# Altium PCB SD171-6.0PCB4.PcbDoc (part 8 of 11)
Units mil, origin at the board's own origin, x right, y up, seen from the top; angles counter-clockwise.
Board outline 5995 x 3921.26 mil, 6 copper layers (Top Layer, GND, Mid-Layer 1, Mid-Layer 2, VCC, Bottom Layer); 477 components, 539 nets, 2143 pads, 1050 vias.
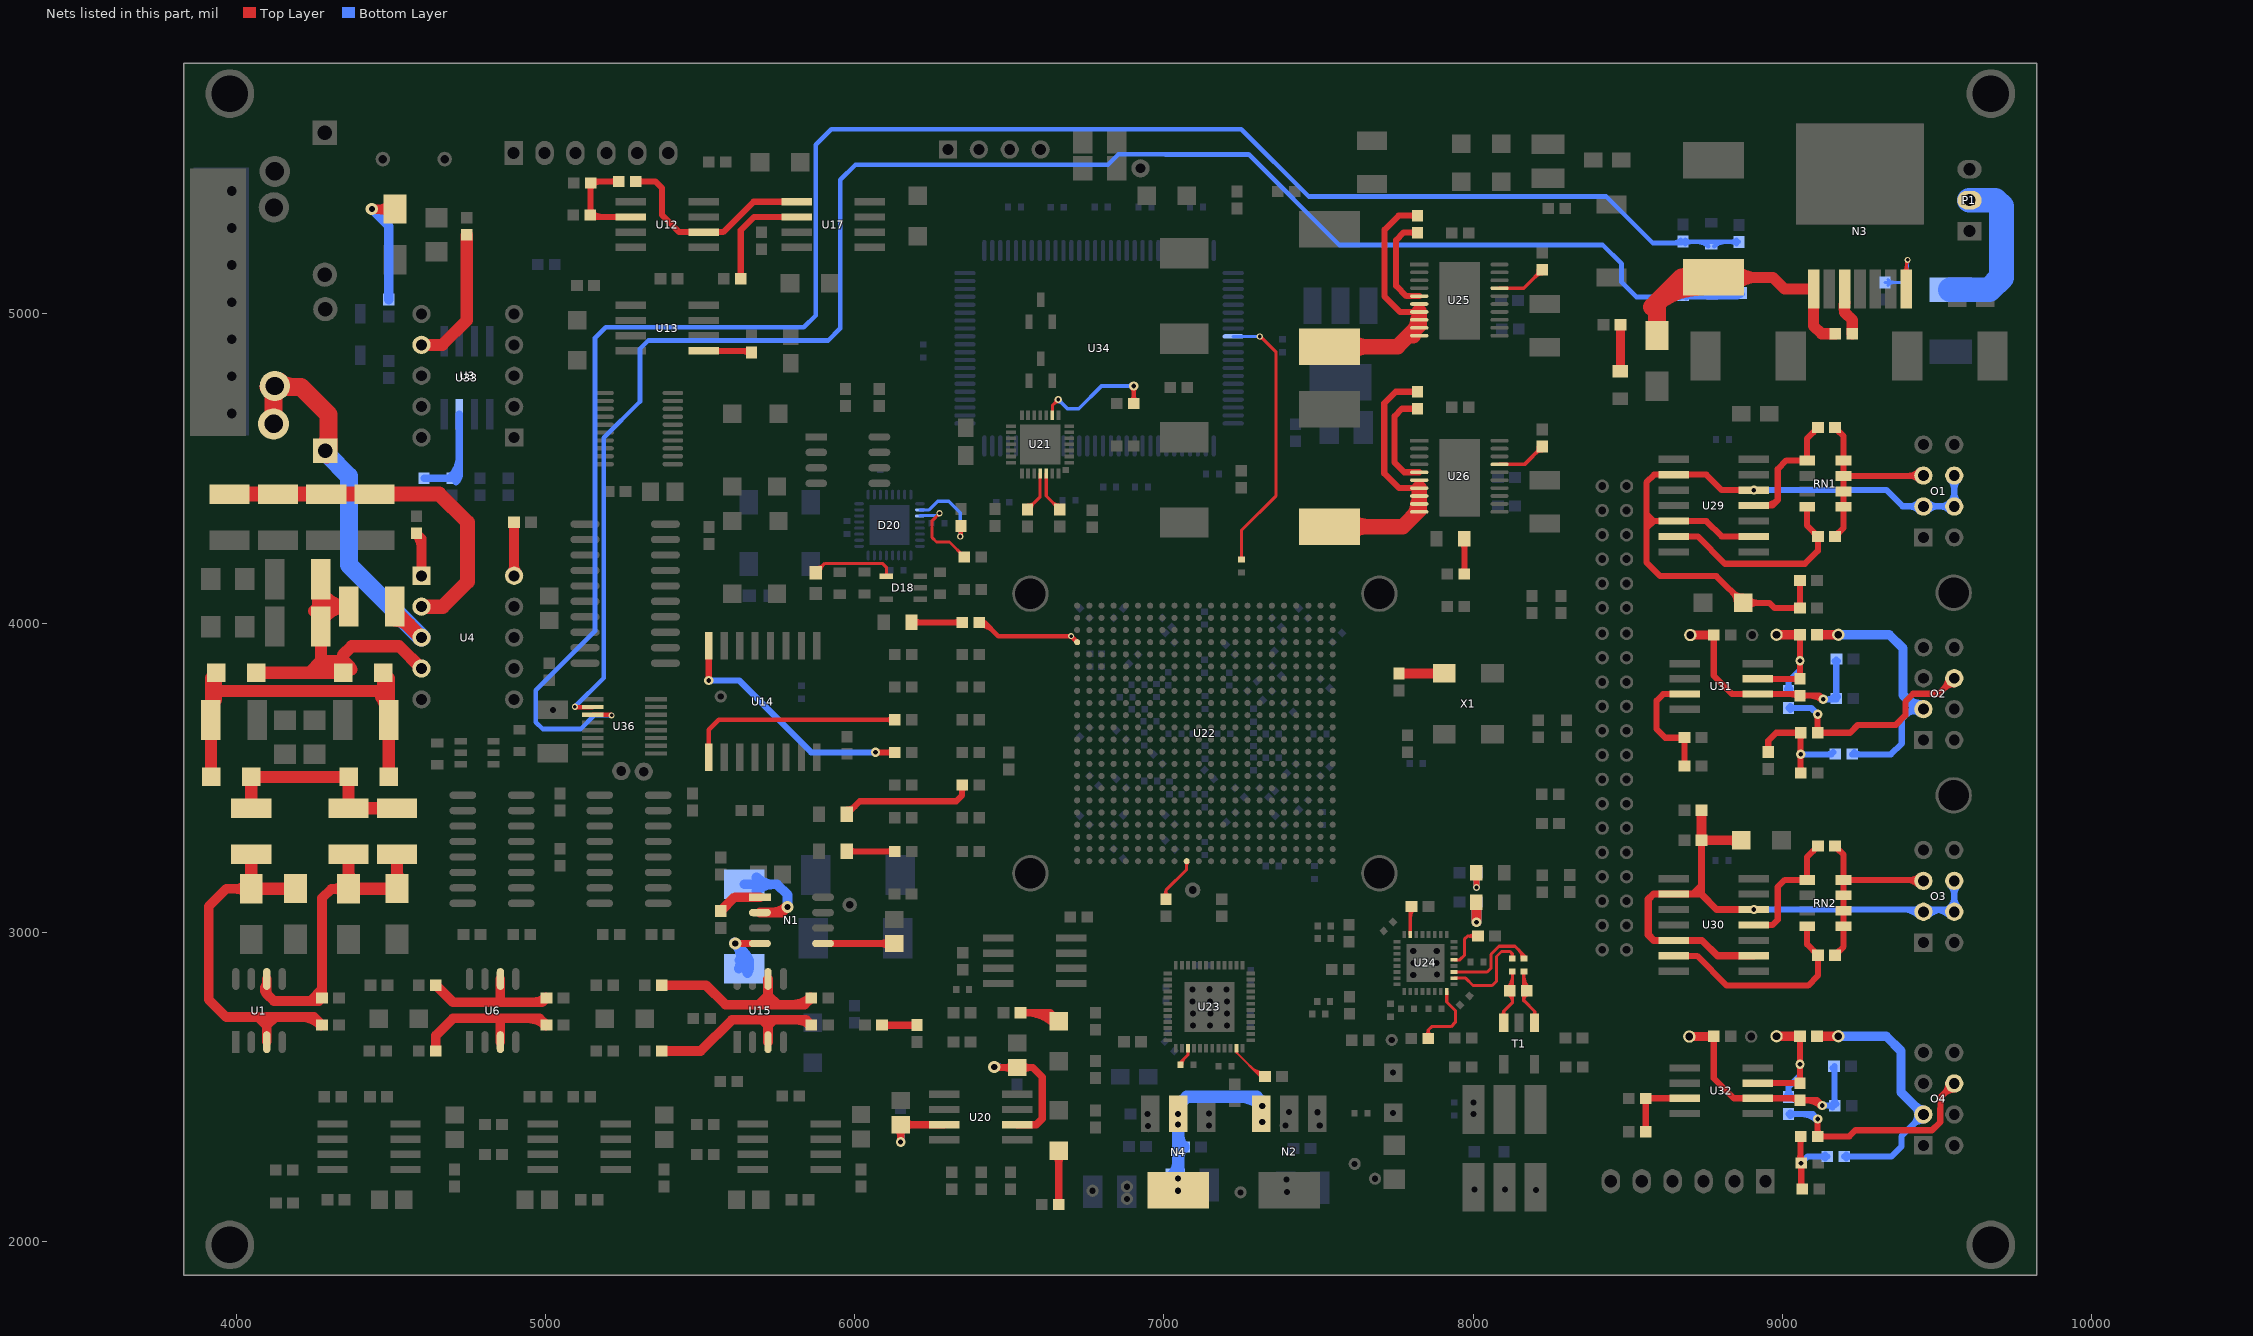
[diagram p12: the nets of this part, all layers, seen from the top]

## Via types
v1: diameter 19.68, hole 11.81, Top Layer to Bottom Layer, 521 vias
v2: diameter 50, hole 25, Top Layer to Bottom Layer, 162 vias
v3: diameter 30, hole 15, Top Layer to Bottom Layer, 100 vias
v4: diameter 39.37, hole 19.68, Top Layer to Bottom Layer, 74 vias
v5: diameter 31.5, hole 15.75, Top Layer to Bottom Layer, 44 vias
v6: diameter 40, hole 20, Top Layer to Bottom Layer, 38 vias
v7: diameter 24, hole 12, Top Layer to Bottom Layer, 33 vias
v8: diameter 47.24, hole 23.62, Top Layer to Bottom Layer, 24 vias
v9: diameter 59.06, hole 31.5, Top Layer to Bottom Layer, 10 vias
v10: diameter 60, hole 30, Top Layer to Bottom Layer, 9 vias
v11: diameter 25.98, hole 12.99, Top Layer to Bottom Layer, tented top, 9 vias
v12: diameter 23.62, hole 11.81, Top Layer to Bottom Layer, 8 vias
v13: diameter 20, hole 12, Top Layer to Bottom Layer, 6 vias
v14: diameter 50, hole 27.56, Top Layer to Bottom Layer, 4 vias
v15: diameter 51.18, hole 27.56, Top Layer to Bottom Layer, 2 vias
v16: diameter 39.37, hole 23.62, Top Layer to Bottom Layer, 2 vias
v17: diameter 80, hole 40, Top Layer to Bottom Layer, 1 vias
v18: diameter 47.24, hole 19.68, Top Layer to Bottom Layer, 1 vias
v19: diameter 47.24, hole 27.56, Top Layer to Bottom Layer, 1 vias
v20: diameter 22.05, hole 11.81, Top Layer to Bottom Layer, 1 vias

## Nets (pads, with @x,y where several pads share a name; then routed paths per layer and width w, separated by ;. In a path a pad name is that pad's centre, name@x,y a point inside that pad or via, vN(x,y) a via of type N, cw(c..) or ccw(c..) an arc to the next point about the centre after c; other vN are vias at no path point) (continued)
NetC55_2: C55.2 U23.27 | length 84.4
  Top Layer w10: C55.2@7053.3,2571.02 7053.3,2578.3 7077.51,2602.51 U23.27@7077.51,2624 ; C55.2@7058.3,2572.02 cw(c7085.54,2572.02) 7066.28,2591.28
NetC64_2: C64.2 U34.89 | length 978.3
  Top Layer w10: C64.2@7251.02,4205.7 7251.02,4300.02 7363,4412 7363,4876 v1@7310,4929 ; 7251.02,4217.77 ccw(c7263.09,4217.77) 7254.55,4209.23 cw(c7263.09,4217.77) 7251.02,4217.77 ; 7251.02,4217.77 cw(c7238.95,4217.77) 7247.48,4209.23 ccw(c7238.95,4217.77) 7251.02,4217.77 ; v1@7310,4922.16 cw(c7310,4905.64) 7321.68,4917.32 ccw(c7310,4905.64) v1@7310,4922.16
  Bottom Layer w10: U34.89@7224.06,4927.39 7309.61,4927.39 v1(7310,4927) ; 7297.38,4927.39 cw(c7297.38,4914.38) 7306.58,4923.58 ccw(c7297.38,4914.38) 7297.38,4927.39 ; 7299.24,4927.39 ccw(c7299.24,4937.76) 7306.58,4930.42 cw(c7299.24,4937.76) 7299.24,4927.39
NetC70_1: C70.1 L27.2 U25.6 U25.7 U25.8 U25.9 U25.10 | length 1293.4
  Top Layer w20: C70.1@7820,5318 7759,5318 7714,5273 7714,5056 7763.54,5006.46 U25.7@7826,5006.46 ; 7800.69,5318 ccw(c7800.69,5337.31) 7814.34,5323.66 cw(c7800.69,5337.31) 7800.69,5318 ; 7800.69,5318 cw(c7800.69,5298.69) 7814.34,5312.34 ccw(c7800.69,5298.69) 7800.69,5318
  Top Layer w50: L27.2@7536,4894 7756,4894 7826,4964 U25.8@7826,4980.87 U25.7@7826,5006.46 ; 7657.59,4894 ccw(c7657.59,4811.78) 7599.45,4869.92 cw(c7657.59,4811.78) 7657.59,4894 ; 7657.59,4894 cw(c7657.59,4976.22) 7599.45,4918.08 ccw(c7657.59,4976.22) 7657.59,4894 ; 7806.35,4944.35 ccw(c7769.82,4980.87) 7821.47,4980.87 cw(c7769.82,4980.87) 7806.35,4944.35 ; U25.10@7806.91,4929.68 cw(c7843.65,4929.68) 7817.67,4955.67 ccw(c7843.65,4929.68) U25.10@7806.91,4929.68
NetC70_2: C70.2 U25.5 | length 376.4
  Top Layer w20: C70.2@7820,5263 7775,5263 7751,5239 7751,5091 7784.36,5057.64 U25.5@7826,5057.64 ; 7800.69,5263 ccw(c7800.69,5282.31) 7814.34,5268.66 cw(c7800.69,5282.31) 7800.69,5263 ; 7800.69,5263 cw(c7800.69,5243.69) 7814.34,5257.34 ccw(c7800.69,5243.69) 7800.69,5263
NetC71_1: C71.1 L28.2 U26.6 U26.7 U26.8 U26.9 U26.10 | length 1278.5
  Top Layer w20: C71.1@7820,4748 7750,4748 7713,4711 7713,4484 7760.54,4436.46 U26.7@7826,4436.46 ; 7800.69,4748 ccw(c7800.69,4767.31) 7814.34,4753.66 cw(c7800.69,4767.31) 7800.69,4748 ; 7800.69,4748 cw(c7800.69,4728.69) 7814.34,4742.34 ccw(c7800.69,4728.69) 7800.69,4748
  Top Layer w50: L28.2@7536,4312 7773,4312 7826,4365 U26.9@7826,4385.28 U26.8@7826,4410.87 U26.7@7826,4436.46 ; 7657.59,4312 ccw(c7657.59,4229.78) 7599.45,4287.92 cw(c7657.59,4229.78) 7657.59,4312 ; 7657.59,4312 cw(c7657.59,4394.22) 7599.45,4336.08 ccw(c7657.59,4394.22) 7657.59,4312 ; 7803.93,4342.93 ccw(c7761.59,4385.28) 7821.47,4385.28 cw(c7761.59,4385.28) 7803.93,4342.93
NetC71_2: C71.2 U26.5 | length 387.6
  Top Layer w20: C71.2@7820,4693 7770,4693 7746,4669 7746,4519 7777.36,4487.64 U26.5@7826,4487.64 ; 7800.69,4693 ccw(c7800.69,4712.31) 7814.34,4698.66 cw(c7800.69,4712.31) 7800.69,4693 ; 7800.69,4693 cw(c7800.69,4673.69) 7814.34,4687.34 ccw(c7800.69,4673.69) 7800.69,4693
NetC72_1: C72.1 U24.3 | length 370.8
  Top Layer w10: U24.3@7937.84,2870.64 8045.64,2870.64 8058,2883 8058,2928 8084,2954 8135.98,2954 8164.98,2925 ; 8147.18,2942.81 cw(c8118.67,2914.3) C72.1@8158.98,2914.3 ; C72.1@8161.78,2918.14 ccw(c8156.04,2925) 8164.98,2925 ; 8164.25,2925.74 cw(c8152.81,2914.3) C72.1@8168.98,2914.3 ; C72.1@8164.98,2914.3 8164.98,2925 ; C72.1@8168.19,2918.14 cw(c8173.93,2925) 8164.98,2925
NetC72_2: C72.2 R100.1 T1.3 | length 354.4
  Top Layer w10: C72.2@8160.45,2868.77 cw(c8151.87,2860.19) 8164,2860.19 ; C72.2@8161.98,2872.3 8164,2870.28 8164,2779 8200,2743 ; 8164,2777.72 cw(c8185.68,2777.72) R100.1@8177.75,2797.9 ; R100.1@8164,2792.39 cw(c8179.92,2792.39) R100.1@8174.1,2807.21 ; 8164,2838.97 ccw(c8201.97,2838.97) R100.1@8175.12,2812.12 ; 8164,2860.27 cw(c8176.01,2860.27) C72.2@8167.52,2868.77 ; C72.2@8164,2863.11 ccw(c8226.11,2863.11) R100.1@8182.19,2819.19 ; T1.3@8193.31,2730.22 ccw(c8184.46,2743) 8200,2743 ; T1.3@8199,2707 8200,2708 8200,2743 ; T1.3@8205.9,2729.24 cw(c8219,2743) 8200,2743
NetC73_1: C73.1 U24.2 | length 329.1
  Top Layer w10: U24.2@7937.84,2850.94 7976.06,2850.94 8000,2827 8062,2827 8076,2841 8076,2921 8092,2937 8120,2937 8126.98,2930.02 C73.1@8126.98,2914.3 ; C73.1@8123.45,2917.84 ccw(c8114.91,2926.37) 8126.98,2926.37 ccw(c8139.05,2926.37) C73.1@8130.52,2917.84
NetC73_2: C73.2 R100.2 T1.1 | length 356.2
  Top Layer w10: T1.1@8092.42,2729.53 ccw(c8079.8,2744) 8099,2744 ; T1.1@8099,2707 8099,2744 ; T1.1@8105.57,2729.53 cw(c8118.2,2744) 8099,2744 ; R100.2@8110.81,2819.19 ccw(c8069.3,2860.7) 8128,2860.7 ; R100.2@8113.12,2798.97 cw(c8096.38,2772.15) 8128,2772.15 ; R100.2@8117.88,2812.12 ccw(c8093.44,2836.56) 8128,2836.56 ; R100.2@8118.41,2807.45 cw(c8107.63,2790.17) 8128,2790.17 ; C73.2@8124.45,2868.77 cw(c8115.87,2860.19) 8128,2860.19 ; C73.2@8124.98,2872.3 8128,2869.28 8128,2773 8099,2744 ; 8128,2860.27 cw(c8140.01,2860.27) C73.2@8131.52,2868.77
NetC78_1: C78.1 U25.17 | length 253.9
  Top Layer w12: U25.17@8085.84,5083.23 8164.23,5083.23 C78.1@8224,5143 ; 8201.81,5120.81 cw(c8224,5098.62) 8224,5130 ccw(c8224,5098.62) 8201.81,5120.81 ; 8204.22,5123.22 ccw(c8185.44,5142) 8212,5142 cw(c8185.44,5142) 8204.22,5123.22
NetC80_1: C80.1 U26.17 | length 253.1
  Top Layer w12: U26.17@8085.84,4513.23 8166.23,4513.23 C80.1@8224,4571 ; 8201.81,4548.81 cw(c8224,4526.62) 8224,4558 ccw(c8224,4526.62) 8201.81,4548.81 ; 8204.22,4551.22 ccw(c8185.44,4570) 8212,4570 cw(c8185.44,4570) 8204.22,4551.22
NetC85_1: C85.1 R107.1 U32.7 | length 415.4
  Top Layer w20: C85.1@8559,2354 8559.09,2354.09 8559.09,2462.09 U32.7@8684.38,2462.09 ; C85.1@8553.34,2359.66 ccw(c8539.46,2373.54) 8559.09,2373.54 cw(c8539.46,2373.54) C85.1@8553.34,2359.66 ; R107.1@8553.34,2456.34 cw(c8539.46,2442.46) 8559.09,2442.46 ccw(c8539.46,2442.46) R107.1@8553.34,2456.34 ; 8559.09,2373.08 ccw(c8578.08,2373.08) 8564.66,2359.66 cw(c8578.08,2373.08) 8559.09,2373.08 ; 8559.09,2442.92 cw(c8578.08,2442.92) 8564.66,2456.34 ccw(c8578.08,2442.92) 8559.09,2442.92 ; R107.1@8565.66,2456.34 cw(c8579.54,2442.46) 8579.54,2462.09 ccw(c8579.54,2442.46) R107.1@8565.66,2456.34 ; R107.1@8565.66,2467.66 ccw(c8579.08,2481.08) 8579.08,2462.09 cw(c8579.08,2481.08) R107.1@8565.66,2467.66
NetC86_1: C86.1 pad.1@8703,3961 R111.1 R126.1 R127.2 U31.2 | length 1102.8
  Top Layer w20: C86.1@8779,3961 8779,3830 8838.91,3770.09 U31.2@8920.6,3770.09 9052.91,3770.09 R111.1@9058,3765 9121,3765 v3(9133,3753) ; 8779,3941.69 ccw(c8759.69,3941.69) 8773.34,3955.34 cw(c8759.69,3941.69) 8779,3941.69 ; 8779,3941.69 cw(c8798.31,3941.69) 8784.66,3955.34 ccw(c8798.31,3941.69) 8779,3941.69 ; 9077.31,3765 ccw(c9077.31,3745.69) 9063.66,3759.34 cw(c9077.31,3745.69) 9077.31,3765 ; 9077.31,3765 cw(c9077.31,3784.31) 9063.66,3770.66 ccw(c9077.31,3784.31) 9077.31,3765 ; 9028.8,3770.09 cw(c9028.8,3736.8) 9052.34,3760.34 ccw(c9028.8,3736.8) 9028.8,3770.09 ; 9091.96,3765 cw(c9091.96,3711.96) 9129.46,3749.46 ccw(c9091.96,3711.96) 9091.96,3765
  Top Layer w30: pad.1@8703,3961 C86.1@8779,3961
  Bottom Layer w20: v3(9133,3753) R127.2@9175,3753 ; v3@9147.44,3753 ccw(c9147.44,3782.56) R127.2@9168.34,3761.66 ; R127.2@9169.34,3761.66 ccw(c9155.69,3775.31) 9175,3775.31 ccw(c9194.31,3775.31) R127.2@9180.66,3761.66 ; R126.1@9169.34,3877.34 cw(c9155.69,3863.69) 9175,3863.69 cw(c9194.31,3863.69) R126.1@9180.66,3877.34 ; R127.2@9175,3754 R126.1@9175,3881
NetC87_1: C87.1 C90.2 L34.2 O3.2 O3.6 O3.7 U30.2 U30.5 U30.9 U30.12 | length 2588.8
  Top Layer w20: U30.9@8908.84,2923 U30.9@8939.84,2923 ; v3(8908.84,3073) U30.12@8939.84,3073
  Top Layer w23.62: 8739,3154 8739,3150 ; C87.1@8739,3297 8739,3150 ; U30.9@8908.84,2923 8791,2923 8741,2973 U30.5@8649,2973 8585,2973 8567,2991 8567,3106 8584,3123 U30.2@8649,3123 8712,3123 ; v3(8908.84,3073) 8788,3073 8738,3123 ; 8712,3123 8738,3123 ; 8712,3123 8739,3150 ; 8738,3123 8739,3124 8739,3150
  Top Layer w31.5: C90.2@8739,3394 C87.1@8739,3297 L34.2@8868,3297 ; 8833.59,3297 ccw(c8833.59,3331.41) 8857.92,3307.08 cw(c8833.59,3331.41) 8833.59,3297 ; 8833.59,3297 cw(c8833.59,3262.59) 8857.92,3286.92 ccw(c8833.59,3262.59) 8833.59,3297
  Bottom Layer w20: v3(8908.84,3073) 9549.67,3073 O3.7@9557,3065.67 O3.6@9557,3165.67 ; 9392.15,3073 cw(c9392.15,3000.82) O3.2@9443.19,3051.86 ; 9427.56,3073 ccw(c9427.56,3095.11) O3.2@9443.19,3079.47 ; O3.2@9470.81,3051.86 cw(c9521.85,3000.82) 9521.85,3073 ; O3.2@9470.81,3079.47 ccw(c9486.44,3095.11) 9486.44,3073 ; 9492.15,3073 cw(c9492.15,3000.82) O3.7@9543.19,3051.86 ; 9527.56,3073 ccw(c9527.56,3095.11) 9543.19,3079.47 ccw(c9509.86,3112.81) 9557,3112.81 ccw(c9604.14,3112.81) O3.7@9570.81,3079.47 ; O3.6@9543.19,3151.86 cw(c9509.86,3118.52) 9557,3118.52 cw(c9604.14,3118.52) O3.6@9570.81,3151.86
NetC89_1: C89.1 R108.1 U31.7 | length 566.7
  Top Layer w20: C89.1@8684,3537 R108.1@8684,3629 8622,3629 8594,3657 8594,3749 8615.09,3770.09 U31.7@8684.38,3770.09 ; 8663.69,3629 ccw(c8663.69,3648.31) 8677.34,3634.66 cw(c8663.69,3648.31) 8663.69,3629 ; 8663.69,3629 cw(c8663.69,3609.69) 8677.34,3623.34 ccw(c8663.69,3609.69) 8663.69,3629 ; 8684,3556.31 ccw(c8703.31,3556.31) 8689.66,3542.66 cw(c8703.31,3556.31) 8684,3556.31 ; 8684,3556.31 cw(c8664.69,3556.31) 8678.34,3542.66 ccw(c8664.69,3556.31) 8684,3556.31 ; 8684,3609.69 ccw(c8664.69,3609.69) 8678.34,3623.34 cw(c8664.69,3609.69) 8684,3609.69 ; 8684,3609.69 cw(c8703.31,3609.69) 8689.66,3623.34 ccw(c8703.31,3609.69) 8684,3609.69
NetC92_1: C92.1 pad.3 R113.1 R129.1 R130.2 U32.2 | length 1123.6
  Top Layer w20: C92.1@8779,2662 8779,2527 8843.91,2462.09 U32.2@8920.6,2462.09 9051.91,2462.09 R113.1@9058,2456 9113,2456 v3(9130,2439) ; 8779,2643.69 ccw(c8759.69,2643.69) 8773.34,2657.34 cw(c8759.69,2643.69) 8779,2643.69 ; 8779,2643.69 cw(c8798.31,2643.69) 8784.66,2657.34 ccw(c8798.31,2643.69) 8779,2643.69 ; 9077.31,2456 ccw(c9077.31,2436.69) 9063.66,2450.34 cw(c9077.31,2436.69) 9077.31,2456 ; 9077.31,2456 cw(c9077.31,2475.31) 9063.66,2461.66 ccw(c9077.31,2475.31) 9077.31,2456 ; 9026.39,2462.09 cw(c9026.39,2425.39) 9052.34,2451.34 ccw(c9026.39,2425.39) 9026.39,2462.09 ; 9076.89,2456 cw(c9076.89,2385.89) 9126.46,2435.46 ccw(c9076.89,2385.89) 9076.89,2456
  Top Layer w30: pad.3@8700,2662 C92.1@8779,2662
  Bottom Layer w20: v3(9130,2439) 9170,2439 R129.1@9170,2566 ; 9147.27,2439 cw(c9147.27,2416.27) R130.2@9163.34,2432.34 ; R129.1@9163.34,2560.34 cw(c9147.27,2544.27) 9170,2544.27 ; R130.2@9164.34,2443.66 ccw(c9150.69,2457.31) 9170,2457.31 ccw(c9189.31,2457.31) R130.2@9175.66,2443.66
NetC93_1: C93.1 R109.2 R114.1 R131.1 | length 421.9
  Top Layer w20: C93.1@9056.34,2247.34 cw(c9042.69,2233.69) 9062,2233.69 cw(c9081.31,2233.69) C93.1@9067.66,2247.34 ; 9060,2274 9059,2274 9060,2275 R114.1@9060,2339 ; 9062,2193.14 ccw(c9088.14,2193.14) R109.2@9069.66,2174.66 ; C93.1@9062,2253 9062,2172 R109.2@9065,2169 ; 9060,2319.69 ccw(c9040.69,2319.69) 9054.34,2333.34 cw(c9040.69,2319.69) 9060,2319.69 ; 9060,2319.69 cw(c9079.31,2319.69) 9065.66,2333.34 ccw(c9079.31,2319.69) 9060,2319.69 ; 9060,2274.73 ccw(c9082.73,2274.73) 9066.66,2258.66 cw(c9082.73,2274.73) 9060,2274.73
  Bottom Layer w20: v3@9062,2253 9083,2274 R131.1@9146,2274 ; R131.1@9139.34,2268.34 ccw(c9125.69,2254.69) 9125.69,2274 ccw(c9125.69,2293.31) R131.1@9139.34,2279.66
  other v3: 9061,2252
NetC94_1: C94.1 C95.1 O1.3 RN1.5 RN1.6 RN1.7 RN1.8 | length 775.9
  Top Layer w20: C95.1@9171,4280 9199,4308 RN1.5@9199,4376 RN1.7@9199,4476 ; C94.1@9171,4632 9199,4604 RN1.8@9199,4526 RN1.7@9199,4476 ; 9407.44,4476 ccw(c9407.44,4526.56) O1.3@9443.19,4490.81 ; 9412.27,4476 cw(c9412.27,4432.27) O1.3@9443.19,4463.19 ; O1.3@9457,4477 9456,4476 RN1.7@9199,4476 ; C95.1@9180,4280 cw(c9201.73,4280) 9186.36,4295.36 ccw(c9201.73,4280) C95.1@9180,4280 ; C94.1@9180,4632 ccw(c9201.73,4632) 9186.36,4616.64 cw(c9201.73,4632) C94.1@9180,4632
NetC94_2: C94.2 RN1.1 U29.11 | length 534
  Top Layer w20: U29.11@8908.84,4380 8968,4380 8986,4398 ; C94.2@9116,4632 9081,4597 RN1.1@9081,4526 9014,4526 8986,4498 8986,4398 ; 8986,4398 cw(c8946.91,4437.09) 8946.27,4381.81 ccw(c8946.91,4437.09) 8986,4398 ; C94.2@9100.64,4616.64 ccw(c9085.27,4632) 9107,4632 cw(c9085.27,4632) C94.2@9100.64,4616.64
NetC95_2: C95.2 RN1.4 U29.6 | length 772.2
  Top Layer w20: U29.6@8649,4280 8727,4280 8815,4192 9074,4192 9116,4234 C95.2@9116,4280 9081,4315 RN1.4@9081,4376 ; 9116,4260.69 ccw(c9096.69,4260.69) 9110.34,4274.34 cw(c9096.69,4260.69) 9116,4260.69 ; 9116,4260.69 cw(c9135.31,4260.69) 9121.66,4274.34 ccw(c9135.31,4260.69) 9116,4260.69 ; C95.2@9100.64,4295.36 cw(c9085.27,4280) 9107,4280 ccw(c9085.27,4280) C95.2@9100.64,4295.36
NetC96_1: C96.1 C97.2 L33.2 O1.2 O1.6 O1.7 U29.2 U29.5 U29.9 U29.12 | length 3352
  Top Layer w20: 8561,4360 8561,4354 ; U29.9@8908.84,4280 8805,4280 8755,4330 U29.5@8649,4330 8585,4330 ; v3(8908.84,4430) 8805,4430 8755,4480 U29.2@8649,4480 8586,4480 8561,4455 8561,4354 ; C97.2@9058,4137 C96.1@9058,4049 8975,4049 8959,4065 L33.2@8874,4065 8787,4152 8605,4152 8561,4196 8561,4306 ; 8561,4306 8561,4330 ; 8561,4306 8585,4330 ; 8561,4330 8561,4354 ; 8561,4330 8585,4330 ; 8561,4354 8585,4330 ; 8839.86,4099.14 ccw(c8874,4133.28) 8874,4085 cw(c8874,4133.28) 8839.86,4099.14 ; 8839.86,4099.14 cw(c8805.72,4065) 8854,4065 ccw(c8805.72,4065) 8839.86,4099.14 ; 8922.28,4065 ccw(c8922.28,4016.72) 8888.14,4050.86 cw(c8922.28,4016.72) 8922.28,4065 ; 8922.28,4065 cw(c8922.28,4113.28) 8888.14,4079.14 ccw(c8922.28,4113.28) 8922.28,4065 ; 9037.69,4049 ccw(c9037.69,4068.31) 9051.34,4054.66 cw(c9037.69,4068.31) 9037.69,4049 ; 9037.69,4049 cw(c9037.69,4029.69) 9051.34,4043.34 ccw(c9037.69,4029.69) 9037.69,4049 ; 9058,4068.31 ccw(c9077.31,4068.31) 9063.66,4054.66 cw(c9077.31,4068.31) 9058,4068.31 ; 9058,4068.31 cw(c9038.69,4068.31) 9052.34,4054.66 ccw(c9038.69,4068.31) 9058,4068.31 ; 9058,4117.69 ccw(c9038.69,4117.69) 9052.34,4131.34 cw(c9038.69,4117.69) 9058,4117.69 ; 9058,4117.69 cw(c9077.31,4117.69) 9063.66,4131.34 ccw(c9077.31,4117.69) 9058,4117.69
  Bottom Layer w20: v3(8908.84,4430) 9338,4430 9390,4378 9556,4378 O1.7@9557,4377 O1.6@9557,4477 ; 9407.44,4378 cw(c9407.44,4327.44) O1.2@9443.19,4363.19 ; 9412.27,4378 ccw(c9412.27,4421.73) O1.2@9443.19,4390.81 ; O1.2@9470.81,4363.19 cw(c9506.56,4327.44) 9506.56,4378 ; O1.2@9470.81,4390.81 ccw(c9501.73,4421.73) 9501.73,4378 ; 9507.44,4378 cw(c9507.44,4327.44) O1.7@9543.19,4363.19 ; 9512.27,4378 ccw(c9512.27,4421.73) 9543.19,4390.81 ccw(c9509.86,4424.14) 9557,4424.14 ccw(c9604.14,4424.14) O1.7@9570.81,4390.81 ; O1.6@9543.19,4463.19 cw(c9509.86,4429.86) 9557,4429.86 cw(c9604.14,4429.86) O1.6@9570.81,4463.19
NetC98_1: C98.1 pad.1@8982,3962 R111.2 R124.2 U31.3 | length 711.7
  Top Layer w20: U31.3@8920.6,3819.31 9057.31,3819.31 R111.2@9058,3820 v3(9058,3878) C98.1@9058,3962 ; 9058,3840.31 ccw(c9077.31,3840.31) 9063.66,3826.66 cw(c9077.31,3840.31) 9058,3840.31 ; 9058,3840.31 cw(c9038.69,3840.31) 9052.34,3826.66 ccw(c9038.69,3840.31) 9058,3840.31 ; 9058,3942.69 ccw(c9038.69,3942.69) 9052.34,3956.34 cw(c9038.69,3942.69) 9058,3942.69 ; 9058,3942.69 cw(c9077.31,3942.69) 9063.66,3956.34 ccw(c9077.31,3942.69) 9058,3942.69 ; 9037.95,3819.31 cw(c9037.95,3798.95) 9052.34,3813.34 ccw(c9037.95,3798.95) 9037.95,3819.31 ; 9039.43,3819.31 ccw(c9039.43,3837.57) 9052.34,3824.66 cw(c9039.43,3837.57) 9039.43,3819.31
  Top Layer w30: pad.1@8982,3962 C98.1@9058,3962
  Bottom Layer w20: R124.2@9021,3780 9021,3811 9058,3848 v3(9058,3878) ; 9021,3800.31 ccw(c9040.31,3800.31) 9026.66,3786.66 cw(c9040.31,3800.31) 9021,3800.31 ; 9021,3800.31 cw(c9001.69,3800.31) 9015.34,3786.66 ccw(c9001.69,3800.31) 9021,3800.31
NetC98_2: C98.2 O2.2 pad.0@9182,3962 R128.2 | length 1066.1
  Top Layer w30: C98.2@9113,3962 pad.0@9182,3962
  Bottom Layer w20: R128.2@9227,3575 9352,3575 9387,3610 9387,3688 9423,3724 9425.67,3721.33 ; R128.2@9233.66,3581.66 ccw(c9249.73,3597.73) 9249.73,3575 ; 9399.47,3700.47 cw(c9451.48,3648.45) O2.2@9457.04,3721.8 ; 9404.67,3705.67 cw(c9424.91,3685.42) O2.2@9443.99,3706.77 ; 9419.63,3720.63 cw(c9439.03,3701.22) O2.2@9457.31,3721.69
  Bottom Layer w30: pad.0@9182,3962 9347,3962 9391,3918 9391,3767 9436.67,3721.33 O2.2@9457,3721.33 ; 9401.17,3756.83 ccw(c9452.13,3807.79) O2.2@9456.18,3735.84
NetC99_1: C99.1 R110.2 R112.1 R128.1 | length 641.3
  Top Layer w20: R110.2@8955,3583 8955,3619 8981,3645 R112.1@9060,3645 v3(9060,3575) C99.1@9060,3515 ; 8955,3603.31 ccw(c8974.31,3603.31) 8960.66,3589.66 cw(c8974.31,3603.31) 8955,3603.31 ; 8955,3603.31 cw(c8935.69,3603.31) 8949.34,3589.66 ccw(c8935.69,3603.31) 8955,3603.31 ; 9039.69,3645 ccw(c9039.69,3664.31) 9053.34,3650.66 cw(c9039.69,3664.31) 9039.69,3645 ; 9039.69,3645 cw(c9039.69,3625.69) 9053.34,3639.34 ccw(c9039.69,3625.69) 9039.69,3645 ; 9060,3534.31 ccw(c9079.31,3534.31) 9065.66,3520.66 cw(c9079.31,3534.31) 9060,3534.31 ; 9060,3534.31 cw(c9040.69,3534.31) 9054.34,3520.66 ccw(c9040.69,3534.31) 9060,3534.31 ; 9060,3625.69 ccw(c9040.69,3625.69) 9054.34,3639.34 cw(c9040.69,3625.69) 9060,3625.69 ; 9060,3625.69 cw(c9079.31,3625.69) 9065.66,3639.34 ccw(c9079.31,3625.69) 9060,3625.69
  Bottom Layer w20: v3(9060,3575) R128.1@9159,3575 ; 9149.27,3575 ccw(c9149.27,3597.73) R128.1@9165.34,3581.66
NetC100_1: C100.1 C101.1 O3.3 RN2.5 RN2.6 RN2.7 RN2.8 | length 777.9
  Top Layer w20: C101.1@9171,2925 9199,2953 RN2.5@9199,3019 RN2.6@9199,3069 RN2.8@9199,3169 ; C100.1@9171,3278 9199,3250 RN2.8@9199,3169 ; 9401.81,3169 cw(c9401.81,3110.48) O3.3@9443.19,3151.86 ; 9417.9,3169 ccw(c9417.9,3204.76) O3.3@9443.19,3179.47 ; O3.3@9457,3165.67 9453.67,3169 RN2.8@9199,3169 ; C101.1@9180,2925 cw(c9201.73,2925) 9186.36,2940.36 ccw(c9201.73,2925) C101.1@9180,2925 ; C100.1@9180,3278 ccw(c9201.73,3278) 9186.36,3262.64 cw(c9201.73,3278) C100.1@9180,3278
NetC100_2: C100.2 RN2.1 U30.11 | length 452.4
  Top Layer w20: U30.11@8908.84,3023 8969,3023 8986,3040 8986,3146 9009,3169 RN2.1@9081,3169 9081,3243 C100.2@9116,3278 ; C100.2@9100.64,3262.64 ccw(c9085.27,3278) 9107,3278 cw(c9085.27,3278) C100.2@9100.64,3262.64
NetC101_2: C101.2 RN2.4 U30.6 | length 789.3
  Top Layer w20: U30.6@8649,2923 8725,2923 8821,2827 9084,2827 9116,2859 C101.2@9116,2925 9081,2960 RN2.4@9081,3019 ; 9116,2905.69 ccw(c9096.69,2905.69) 9110.34,2919.34 cw(c9096.69,2905.69) 9116,2905.69 ; 9116,2905.69 cw(c9135.31,2905.69) 9121.66,2919.34 ccw(c9135.31,2905.69) 9116,2905.69 ; C101.2@9100.64,2940.36 cw(c9085.27,2925) 9107,2925 ccw(c9085.27,2925) C101.2@9100.64,2940.36
NetC102_1: C102.1 pad.1@8982,2663 R113.2 R125.2 U32.3 | length 729.1
  Top Layer w20: U32.3@8920.6,2511.31 R113.2@9057.69,2511.31 ; R113.2@9058,2511 v3(9058,2572) C102.1@9058,2663 ; 9058,2531.31 ccw(c9077.31,2531.31) 9063.66,2517.66 cw(c9077.31,2531.31) 9058,2531.31 ; 9058,2531.31 cw(c9038.69,2531.31) 9052.34,2517.66 ccw(c9038.69,2531.31) 9058,2531.31 ; 9058,2643.69 ccw(c9038.69,2643.69) 9052.34,2657.34 cw(c9038.69,2643.69) 9058,2643.69 ; 9058,2643.69 cw(c9077.31,2643.69) 9063.66,2657.34 ccw(c9077.31,2643.69) 9058,2643.69 ; 9037.95,2511.31 cw(c9037.95,2490.95) 9052.34,2505.34 ccw(c9037.95,2490.95) 9037.95,2511.31 ; 9039.43,2511.31 ccw(c9039.43,2529.57) 9052.34,2516.66 cw(c9039.43,2529.57) 9039.43,2511.31
  Top Layer w30: pad.1@8982,2663 C102.1@9058,2663
  Bottom Layer w20: R125.2@9021,2466 9021,2500 9058,2537 v3(9058,2572) ; 9021,2486.31 ccw(c9040.31,2486.31) 9026.66,2472.66 cw(c9040.31,2486.31) 9021,2486.31 ; 9021,2486.31 cw(c9001.69,2486.31) 9015.34,2472.66 ccw(c9001.69,2486.31) 9021,2486.31
NetC102_2: C102.2 O4.2 pad.0@9182,2663 R131.2 | length 1017.9
  Top Layer w30: C102.2@9113,2663 pad.0@9182,2663
  Bottom Layer w20: R131.2@9201,2274 9354,2274 9386,2306 9386,2339 O4.2@9457,2410 ; R131.2@9207.66,2268.34 cw(c9221.31,2254.69) 9221.31,2274 cw(c9221.31,2293.31) R131.2@9207.66,2279.66 ; O4.2@9437.47,2410 cw(c9390.33,2410) 9423.66,2376.66 cw(c9457,2343.33) O4.2@9457,2390.47
  Bottom Layer w30: pad.0@9182,2663 9337,2663 9385,2615 9385,2482 O4.2@9457,2410 ; O4.2@9442.47,2410 ccw(c9407.4,2410) 9432.2,2434.8 ccw(c9457,2459.6) O4.2@9457,2424.53
NetC103_1: C103.1 D6.2 L32.1 N3.1 | length 1531
  Top Layer w36: L32.1@8778,5118 8971,5118 9008.22,5080.78 N3.1@9102,5080.78 9102,4961 9127,4936 C103.1@9172,4936 ; 8916.49,5118 ccw(c8916.49,5018.88) 8846.4,5088.97 cw(c8916.49,5018.88) 8916.49,5118 ; 8916.49,5118 cw(c8916.49,5217.12) 8846.4,5147.03 ccw(c8916.49,5217.12) 8916.49,5118
  Top Layer w59.06: 8579.6,5022.6 cw(c8738.63,4863.57) L32.1@8738.63,5088.47 ; D6.2@8595,4930 8595,5038 8675,5118 ; 8643.19,5086.19 cw(c8687.07,5042.3) L32.1@8722.01,5093.6 ; L32.1@8716.08,5098.94 ccw(c8675,5064.21) 8675,5118 ; L32.1@8716.08,5137.06 cw(c8675,5171.79) 8675,5118 ; L32.1@8778,5118 8675,5118
NetC103_2: C103.2 N3.3 | length 198.9
  Top Layer w36: N3.3@9202,5080.78 9202,5005 9227,4980 C103.2@9227,4936 ; N3.3@9202.65,5036.24 ccw(c9238.12,5022.61) 9211.26,4995.74
NetC106_1: C106.1 R117.1 U33.7 | length 517.3
  Bottom Layer w23.62: C106.1@4606,4468 R117.1@4696.77,4468 4720.21,4491.44 U33.7@4720.21,4676 ; R117.1@4692.4,4473.38 ccw(c4625.24,4540.53) 4720.21,4540.53 cw(c4625.24,4540.53) R117.1@4692.4,4473.38 ; R117.1@4709.1,4456.67 ccw(c4682.27,4483.5) 4720.21,4483.5 cw(c4682.27,4483.5) R117.1@4709.1,4456.67
NetC107_1: C107.1 N1.2 | length 641
  Top Layer w31.5: N1.2@5692.75,3063 5764,3063 v4(5782,3081) ; 5729.04,3063 ccw(c5729.04,3133.96) 5779.22,3083.78 cw(c5729.04,3133.96) 5729.04,3063
  Bottom Layer w31.5: C107.1@5642,3154.62 5748.38,3154.62 5782,3121 v4(5782,3081) ; C107.1@5681.99,3132.35 cw(c5735.75,3078.58) 5735.75,3154.62 cw(c5735.75,3230.66) C107.1@5681.99,3176.89 ; C107.1@5681.99,3132.54 cw(c5735.3,3079.23) 5735.3,3154.62 ; C107.1@5681.99,3177.08 ccw(c5736.21,3231.31) 5736.21,3154.62
NetC107_2: C107.2 N1.4 | length 462
  Top Layer w23.62: v4(5613,2963) N1.4@5692.75,2963
  Bottom Layer w31.5: v4@5609.41,2966.59 cw(c5556.13,2913.31) C107.2@5624.28,2881.19 ; v4(5613,2963) 5642,2934 ; C107.2@5626.94,2908.66 ccw(c5613.16,2934) 5642,2934 ; C107.2@5627.03,2908.9 ccw(c5613.48,2934) 5642,2934 ; 5641.07,2934.93 cw(c5599.17,2893.03) C107.2@5652.77,2867.76 ; C107.2@5642,2881 5642,2934 ; C107.2@5656.97,2908.9 cw(c5670.52,2934) 5642,2934 ; C107.2@5657.06,2908.66 cw(c5670.84,2934) 5642,2934
NetC112_2: C112.2 L21.2 U20.3 | length 489.7
  Top Layer w23.62: v5(6148,2321) L21.2@6148,2376.63 6148.37,2377 U20.3@6289,2377 ; 6148,2338.61 ccw(c6109.98,2338.61) 6136.86,2365.49 cw(c6109.98,2338.61) 6148,2338.61 ; 6148,2338.61 cw(c6186.02,2338.61) 6159.14,2365.49 ccw(c6186.02,2338.61) 6148,2338.61 ; L21.2@6161.1,2365.49 cw(c6188.88,2337.72) 6188.88,2377 ccw(c6188.88,2337.72) L21.2@6161.1,2365.49 ; L21.2@6161.1,2387.77 ccw(c6187.09,2413.76) 6187.09,2377 cw(c6187.09,2413.76) L21.2@6161.1,2387.77
  Bottom Layer w23.62: v5(6148,2321) C112.2@6148,2375
NetC116_1: C116.1 L23.1 U20.6 | length 777.6
  Top Layer w23.62: v4(6451,2563) 6452.37,2561.63 L23.1@6525,2561.63 6575.37,2561.63 6606,2531 6606,2396 6587,2377 U20.6@6525.22,2377 ; 6485.01,2561.63 ccw(c6485.01,2599.65) 6511.9,2572.77 cw(c6485.01,2599.65) 6485.01,2561.63 ; 6485.01,2561.63 cw(c6485.01,2523.61) 6511.9,2550.49 ccw(c6485.01,2523.61) 6485.01,2561.63 ; 6564.99,2561.63 ccw(c6564.99,2523.61) 6538.1,2550.49 cw(c6564.99,2523.61) 6564.99,2561.63 ; 6564.99,2561.63 cw(c6564.99,2599.65) 6538.1,2572.77 ccw(c6564.99,2599.65) 6564.99,2561.63 ; v4@6456.57,2568.57 ccw(c6473.32,2585.32) 6473.32,2561.63 cw(c6473.32,2585.32) v4@6456.57,2568.57
  Bottom Layer w23.62: v4(6451,2563) 6452,2562 C116.1@6525,2562 ; v4@6456.57,2568.57 ccw(c6472.42,2584.42) 6472.42,2562 cw(c6472.42,2584.42) v4@6456.57,2568.57
NetC212_1: C212.1 R31.2 R37.1 U12.2 | length 482.5
  Top Layer w20: R31.2@5139.34,5325.66 ccw(c5125.69,5339.31) 5145,5339.31 ccw(c5164.31,5339.31) 5150.66,5325.66 ccw(c5179.03,5354.03) 5179.03,5313.91 ; C212.1@5139.34,5418.34 cw(c5125.69,5404.69) 5145,5404.69 cw(c5164.31,5404.69) C212.1@5150.66,5418.34 ; C212.1@5151.66,5418.34 cw(c5177.38,5392.62) 5177.38,5429 ; R37.1@5229.34,5423.34 ccw(c5215.69,5409.69) 5215.69,5429 ccw(c5215.69,5448.31) R37.1@5229.34,5434.66 ; R37.1@5236,5429 5150,5429 C212.1@5145,5424 5145,5321 R31.2@5144,5320 5150.09,5313.91 U12.2@5275.4,5313.91
NetC213_1: C213.1 C214.1 N2.3 N4.2 N4.4 pad.0@7046,2163 pad.0@7046,2203 pad.0@7046,2377 pad.0@7046,2411 pad.0@7318,2385 pad.0@7318,2437 | length 912.2
  Bottom Layer w39.37: C213.1@7027.53,2212.01 ccw(c6982.94,2256.59) 7046,2256.59 ; C213.1@7035.88,2182 7046,2192.12 pad.0@7046,2411 ; 7046,2265.61 cw(c7103.39,2265.61) C214.1@7062.81,2306.19 ; 7046,2344.39 ccw(c7103.39,2344.39) C214.1@7062.81,2303.81 ; 7065.8,2458.8 ccw(c7113.6,2411) pad.0@7046,2411 ; 7245.57,2467 cw(c7245.57,2364.57) pad.0@7318,2437 ccw(c7289.03,2437) 7309.51,2457.49 ; pad.0@7318,2385 7318,2420 7318,2449 7300,2467 7074,2467 7046,2439 pad.0@7046,2411
NetC218_2: C218.2 R139.1 R141.2 U36.2 | length 5865.4
  Top Layer w15: v1@5095,3728 U36.2@5152,3728
  Bottom Layer w15: v1(5094,3729) 5187,3822 5187,4599 5304.76,4716.76 5304.76,4886.76 5332,4914 5914,4914 5953,4953 5953,5434 6002,5483 6819,5483 6853,5517 7003,5517 ; 7004,5516 7274,5516 7567,5223 8419.5,5223 8480.5,5162 8480.5,5102.5 8528,5055 8856,5055 R139.1@8869,5068 ; 8653.47,5055 ccw(c8653.47,5076.98) C218.2@8669.01,5061.44 ; 8658.95,5055 cw(c8658.95,5040.76) C218.2@8669.01,5050.83 ; C218.2@8688.99,5050.83 cw(c8699.05,5040.76) 8699.05,5055 ; C218.2@8688.99,5061.44 ccw(c8704.53,5076.98) 8704.53,5055 ; 8724.51,5055 ccw(c8724.51,5114.49) R141.2@8766.58,5072.42 ; R141.2@8781.42,5072.42 ccw(c8823.49,5114.49) 8823.49,5055 ; 8814.68,5055 ccw(c8814.68,5121.32) R139.1@8861.58,5074.42 ; 8850.89,5055 ccw(c8850.89,5085.11) R139.1@8872.18,5063.82
NetC219_2: C219.2 R140.1 R142.2 U36.3 | length 6310.3
  Top Layer w15: U36.3@5152,3703 5211,3703 v1(5213,3701) ; 5202.52,3703 cw(c5202.52,3690.52) v1@5211.34,3699.34
  Bottom Layer w15: v1(5213,3701) 5157,3701 5113,3657 4990,3657 4968,3679 4968,3782 5159,3973 5159,4922 5194,4957 5835,4957 5873,4995 5873,5547 5924,5598 7250,5598 7468,5380 8431.5,5380 8582,5229.5 8674.5,5229.5 R142.2@8679,5234 8680,5233 R140.1@8860,5233 ; 8645.2,5229.5 ccw(c8645.2,5266.8) R142.2@8671.58,5240.42 ; R142.2@8686.42,5225.58 cw(c8704.35,5207.65) 8704.35,5233 cw(c8704.35,5258.35) R142.2@8686.42,5240.42 ; 8726.8,5233 cw(c8726.8,5184.62) C219.2@8761.01,5218.83 ; C219.2@8780.99,5218.83 cw(c8815.2,5184.62) 8815.2,5233 ; R140.1@8852.58,5225.58 ccw(c8834.65,5207.65) 8834.65,5233 ccw(c8834.65,5258.35) R140.1@8852.58,5240.42
NetD1_1: D1.1 D2.2 R4.1 R15.2 U1.3 | length 1981.4
  Top Layer w31.5: 3995.71,3140 cw(c3995.71,3088.73) D1.1@4031.97,3124.98 ; D1.1@4031.97,3124.97 ccw(c3995.67,3088.67) 3995.67,3140 ; D1.1@4047,3140.02 3966,3140 3909,3083 3909,2782 3966,2725 4069,2725 ; U1.3@4097,2644.75 4097,2697 ; R15.2@4276,2699 4250,2725 4125,2725 ; 3995.67,3140 ccw(c3995.67,3191.33) 4031.97,3155.03 cw(c3995.64,3191.38) 3995.64,3140 ; 4069,2725 4098,2725 ; 4069,2725 4097,2697 ; 4097,2697 4097,2724 4098,2725 ; 4097,2697 4125,2725 ; 4098,2725 4125,2725 ; 4206.79,2725 cw(c4206.79,2630.79) 4273.41,2697.41 ccw(c4206.79,2630.79) 4206.79,2725
  Top Layer w39.37: R4.1@4047,3251.2 D1.1@4047,3140.02 D2.2@4190,3140 ; 4088.86,3140 cw(c4088.86,3181.87) 4059.25,3152.26 ccw(c4088.82,3181.82) 4088.82,3140 ; 4145.76,3140 ccw(c4145.76,3185.24) D2.2@4177.75,3153.25 ; 4150.59,3140 cw(c4150.59,3101.59) D2.2@4177.75,3128.75 ; D2.2@4177.75,3127.75 ccw(c4148.18,3098.18) 4148.18,3140 ccw(c4148.18,3181.82) D2.2@4177.75,3152.25 ; 4088.82,3140 ccw(c4088.82,3098.18) 4059.25,3127.75 cw(c4088.78,3098.23) 4088.78,3140 ; D1.1@4034.75,3162.74 ccw(c4005.18,3192.31) 4047,3192.31 ccw(c4088.82,3192.31) 4059.25,3162.74 cw(c4088.82,3192.33) 4047,3192.33 cw(c4005.18,3192.33) D1.1@4034.75,3162.76
NetD3_1: D3.1 D5.2 R12.2 R14.1 R19.1 U1.6 | length 2000.7
  Top Layer w31.5: U1.6@4093.61,2826.63 ccw(c4112.5,2815.51) 4097,2800 ; U1.6@4097,2849 4097,2800 ; R12.2@4274.21,2784.89 ccw(c4262.25,2752.75) 4238,2777 ; 4276,2824 4276,2815 ; 4310.71,3140 cw(c4310.71,3088.73) D3.1@4346.97,3124.98 ; D3.1@4346.97,3124.97 ccw(c4310.67,3088.67) 4310.67,3140 ; D3.1@4362,3140.02 4306,3140 4276,3110 4276,2815 ; 4097,2800 4120,2777 4238,2777 ; 4238,2777 4266,2777 R12.2@4276,2787 4276,2815 ; 4238,2777 4276,2815 ; 4310.67,3140 ccw(c4310.67,3191.33) 4346.97,3155.03 cw(c4310.64,3191.38) 4310.64,3140 ; U1.6@4093.06,2824.63 ccw(c4143.02,2824.63) 4107.7,2789.3 cw(c4142.98,2824.61) U1.6@4093.06,2824.63 ; 4245.42,2777 ccw(c4245.42,2816.58) 4273.41,2788.59 cw(c4245.42,2816.58) 4245.42,2777
  Top Layer w39.37: R14.1@4362,3251.2 D3.1@4362,3140.02 4519,3140 R19.1@4519,3251.2 ; 4403.86,3140 cw(c4403.86,3181.87) 4374.25,3152.26 ccw(c4403.82,3181.82) 4403.82,3140 ; 4474.76,3140 ccw(c4474.76,3185.24) D5.2@4506.75,3153.25 ; 4479.59,3140 cw(c4479.59,3101.59) D5.2@4506.75,3128.75 ; D5.2@4506.75,3127.75 ccw(c4477.18,3098.18) 4477.18,3140 ccw(c4477.18,3181.82) D5.2@4506.75,3152.25 ; D5.2@4506.75,3162.74 ccw(c4477.18,3192.31) 4519,3192.31 ccw(c4560.82,3192.31) D5.2@4531.25,3162.74 ; D5.2@4506.75,3163.74 ccw(c4477.18,3193.31) 4519,3193.31 ccw(c4560.82,3193.31) D5.2@4531.25,3163.74 ; 4403.82,3140 ccw(c4403.82,3098.18) 4374.25,3127.75 cw(c4403.78,3098.23) 4403.78,3140 ; D3.1@4349.75,3162.74 ccw(c4320.18,3192.31) 4362,3192.31 ccw(c4403.82,3192.31) 4374.25,3162.74 cw(c4403.82,3192.33) 4362,3192.33 cw(c4320.18,3192.33) D3.1@4349.75,3162.76
NetD4_2: D4.2 R115.1 | length 551
  Top Layer w31.5: v4(4437,5339) 4437.42,5338.58 D4.2@4511.81,5338.58 ; 4458.07,5338.58 ccw(c4458.07,5393.32) D4.2@4496.78,5354.62 ; 4462.9,5338.58 cw(c4462.9,5290.67) D4.2@4496.78,5324.55 ; D4.2@4496.78,5323.55 ccw(c4460.49,5287.26) 4460.49,5338.58 ccw(c4460.49,5389.91) D4.2@4496.78,5353.62
  Bottom Layer w31.5: v4(4437,5339) 4492,5284 R115.1@4492,5047
NetD8_1: D8.1 R62.1 | length 549.8
  Top Layer w20: D8.1@5974,3381 6016,3423 6328,3423 6347,3442 R62.1@6347,3476 ; 6347,3456.69 ccw(c6327.69,3456.69) 6341.34,3470.34 cw(c6327.69,3456.69) 6347,3456.69 ; 6347,3456.69 cw(c6366.31,3456.69) 6352.66,3470.34 ccw(c6366.31,3456.69) 6347,3456.69 ; D8.1@5974,3396 ccw(c5974,3432.21) 5999.61,3406.61 cw(c5974,3432.21) D8.1@5974,3396
NetD9_1: D9.1 R56.2 | length 291.5
  Top Layer w20: D9.1@5974,3261 R56.2@6129,3261 ; 5998.14,3261 ccw(c5998.14,3236.86) 5981.07,3253.93 cw(c5998.14,3236.86) 5998.14,3261 ; 5998.14,3261 cw(c5998.14,3285.14) 5981.07,3268.07 ccw(c5998.14,3285.14) 5998.14,3261 ; 6108.69,3261 ccw(c6108.69,3280.31) 6122.34,3266.66 cw(c6108.69,3280.31) 6108.69,3261 ; 6108.69,3261 cw(c6108.69,3241.69) 6122.34,3255.34 ccw(c6108.69,3241.69) 6108.69,3261
NetD10_1: D10.1 R66.2 | length 300.5
  Top Layer w20: D10.1@6183,4002 R66.2@6347,4002 ; 6207.14,4002 ccw(c6207.14,3977.86) 6190.07,3994.93 cw(c6207.14,3977.86) 6207.14,4002 ; 6207.14,4002 cw(c6207.14,4026.14) 6190.07,4009.07 ccw(c6207.14,4026.14) 6207.14,4002 ; 6326.69,4002 ccw(c6326.69,4021.31) 6340.34,4007.66 cw(c6326.69,4021.31) 6326.69,4002 ; 6326.69,4002 cw(c6326.69,3982.69) 6340.34,3996.34 ccw(c6326.69,3982.69) 6326.69,4002
NetD13_1: D13.1 R94.2 | length 251.5
  Top Layer w20: R94.2@7972,4158 D13.1@7972,4273 ; 7972,4177.31 ccw(c7991.31,4177.31) 7977.66,4163.66 cw(c7991.31,4177.31) 7972,4177.31 ; 7972,4177.31 cw(c7952.69,4177.31) 7966.34,4163.66 ccw(c7952.69,4177.31) 7972,4177.31 ; 7972,4243.86 ccw(c7947.86,4243.86) 7964.93,4260.93 cw(c7947.86,4243.86) 7972,4243.86 ; 7972,4243.86 cw(c7996.14,4243.86) 7979.07,4260.93 ccw(c7996.14,4243.86) 7972,4243.86
NetD14_1: D14.1 R122.2 | length 265.8
  Top Layer w19.68: v12(8011,3144) D14.1@8011,3192 ; 8011,3162.48 ccw(c7986.48,3162.48) 8003.82,3179.82 cw(c7986.48,3162.48) 8011,3162.48 ; 8011,3162.48 cw(c8035.52,3162.48) 8018.18,3179.82 ccw(c8035.52,3162.48) 8011,3162.48
  Bottom Layer w19.68: v12(8011,3144) R122.2@8011,3192 ; R122.2@8005.23,3186.23 cw(c7991.31,3172.31) 8011,3172.31 ; R122.2@8005.23,3186.23 cw(c7991.31,3172.31) 8011,3172.31 ; R122.2@8005.23,3186.23 cw(c7991.31,3172.31) 8011,3172.31 ; 8011,3172.31 cw(c8030.69,3172.31) R122.2@8016.77,3186.23 ; 8011,3172.31 cw(c8030.69,3172.31) R122.2@8016.77,3186.23 ; 8011,3172.31 cw(c8030.69,3172.31) R122.2@8016.77,3186.23
NetD15_1: D15.1 R123.2 | length 130
  Top Layer w31.5: v5(8011,3032) D15.1@8011,3097
  Bottom Layer w31.5: v5(8011,3032) R123.2@8011,3097
NetD16_1: D16.1 R106.1 | length 150
  Top Layer w30: D16.1@8477,4815 R106.1@8477,4965
NetD18_4: D18.4 R157.1 | length 347.5
  Top Layer w10: R157.1@5873,4162.5 5873,4163 5903,4193 6089,4193 6101.66,4180.34 D18.4@6101.66,4151.15 ; R157.1@5873,4179 ccw(c5873,4217.63) 5900.31,4190.31 ; R157.1@5888,4164 cw(c5921.8,4164) 5897.9,4187.9 ; D18.4@6098.93,4153.88 ccw(c6092.35,4160.46) 6101.66,4160.46 ccw(c6110.98,4160.46) D18.4@6104.39,4153.88
NetD20_2: D20.2 R158.1 | length 275.4
  Top Layer w15: R158.1@6338.66,4318.34 R158.1@6343,4314 6343,4282 v13(6341,4280)
  Bottom Layer w10: D20.2@6210.43,4366.21 6240.21,4366.21 6268,4394 6304,4394 6341,4357 6341,4297 v13(6341,4280)
NetD20_3: D20.3 R159.1 | length 285.7
  Top Layer w10: v13(6274.01,4355.01) 6250,4331 6250,4276 6264,4262 6306,4262 R159.1@6354,4214
  Bottom Layer w10: D20.3@6210.43,4346.53 6211.38,4347.48 6266.48,4347.48 v13(6274.01,4355.01)
NetJ2_1: J2.1 pad.1@4119,4644 Q2.1 R17.1 U4.3 | length 1515.1
  Top Layer w47.24: R17.1@4511.8,4038.59 U4.3@4597.64,3952.76 ; R17.1@4511.8,4011.66 cw(c4511.8,3946.65) 4557.77,3992.62 ccw(c4511.8,3946.65) R17.1@4511.8,4011.66
  Top Layer w59.06: J2.1@4102.36,4763.78 4207.22,4763.78 4297,4674 4297,4551.92 Q2.1@4291.34,4546.26 ; pad.1@4119,4644 J2.1@4119,4747.14 ; J2.1@4137.28,4780.7 ccw(c4178.13,4821.55) 4178.13,4763.78 ; Q2.1@4279.7,4564.04 ccw(c4237.94,4605.8) 4297,4605.8 ; R17.1@4511.8,4038.59 R17.1@4511.8,4053
  Bottom Layer w59.06: Q2.1@4291.34,4546.26 4363,4474.6 4363,4187.39 U4.3@4597.64,3952.76
NetL1_1: L1.1 L2.2 L3.1 L4.2 R1.2 R18.1 | length 2115.2
  Top Layer w31.5: 4488,3780 4492,3776
  Top Layer w39.37: L2.2@3917,3502 3916.39,3502.61 R1.2@3916.39,3686 R1.2@3916.39,3734 ; 4466.23,3760.77 cw(c4431.64,3726.18) R18.1@4480.26,3720.77 ; R18.1@4480.84,3723.32 ccw(c4453.7,3732.7) 4474,3753 ; 4488,3780 4474,3780 ; L4.2@4492,3502 R18.1@4492,3686 R18.1@4492,3735 ; R1.2@3916.39,3734 3916.39,3780 ; R1.2@3916.39,3734 3933,3750.61 3933,3780 ; 3916.39,3780 3933,3780 ; 3916.39,3780 3916.39,3822.39 L1.1@3933,3839 3933,3780 ; 3933,3780 cw(c3866.13,3780) 3908.85,3728.55 ccw(c3866.13,3780) 3933,3780 ; 3933,3780 4474,3780 ; 4474,3753 ccw(c4495.96,3753) 4493.38,3731.19 cw(c4495.96,3753) 4474,3753 ; 4474,3753 4474,3780 ; 4474,3753 R18.1@4492,3735 ; 4474,3780 ccw(c4538.55,3780) 4499.2,3728.83 cw(c4538.55,3780) 4474,3780 ; 4474,3780 L3.1@4474,3839 4492,3821 4492,3776 R18.1@4492,3735 ; 3916.39,3777.71 cw(c3989.3,3777.71) 3939.98,3831.4 ccw(c3989.3,3777.71) 3916.39,3777.71 ; L3.1@4466.93,3831.49 cw(c4412.36,3773.48) 4492,3773.48 ccw(c4412.36,3773.48) L3.1@4466.93,3831.49
NetL1_2: L1.2 L3.2 R8.1 R9.1 R17.2 U4.4 | length 1675.5
  Top Layer w39.37: L1.2@4063,3839 4236,3839 ; R9.1@4250.88,4038.87 cw(c4280.28,4015.35) R9.1@4280.28,4053 ; R9.1@4272.4,3988.19 4273,3987.59 4273,3877 ; 4272.4,4059 4278.4,4053 R17.2@4362.2,4053 ; R8.1@4281.62,4091.72 ccw(c4362.19,4156.17) R17.2@4362.2,4053 ; 4330.86,3877 cw(c4330.86,3833.81) L3.2@4371.03,3849.66 ; U4.4@4597.64,3852.76 4525.39,3925 4372,3925 4344,3897 4344,3874 ; 4236,3839 4273,3839 ; 4236,3839 4236,3840 4273,3877 ; 4273,3839 4273,3877 ; 4273,3839 L3.2@4344,3839 4344,3874 ; 4273,3877 cw(c4273,3810.99) 4334.4,3835.21 ccw(c4273,3810.99) 4273,3877 ; 4273,3877 4341,3877 4344,3874 ; R17.2@4362.2,4053 ccw(c4362.19,3949.83) 4281.62,4014.28 cw(c4362.19,3949.83) R17.2@4362.2,4053
  Top Layer w59.06: R9.1@4272.4,3988.19 4272.4,4059 R8.1@4272.4,4141.73
NetL2_1: L2.1 L4.1 R4.2 R14.2 R19.2 | length 674.4
  Top Layer w39.37: R4.2@4047,3400.8 L2.1@4047,3502 L4.1@4362,3502 R14.2@4362,3400.8 R19.2@4519,3400.8
NetL20_1: L20.1 N1.5 | length 349.6
  Top Layer w23.62: N1.5@5897,2963 6126.63,2963 L20.1@6127,2962.63 ; 6086.12,2963 cw(c6086.12,2923.72) 6113.9,2951.49 ccw(c6086.12,2923.72) 6086.12,2963 ; 6087.91,2963 ccw(c6087.91,2999.76) 6113.9,2973.77 cw(c6087.91,2999.76) 6087.91,2963
NetL24_1: L24.1 R74.1 | length 473.2
  Top Layer w23.62: R74.1@6536,2739 6633,2739 L24.1@6660,2712 ; R74.1@6550.9,2739 cw(c6550.9,2602.9) 6647.14,2699.14 ccw(c6550.9,2602.9) R74.1@6550.9,2739 ; 6607.93,2739 cw(c6607.93,2659.93) 6663.84,2715.84 ccw(c6607.93,2659.93) 6607.93,2739
NetL25_1: L25.1 R75.1 | length 313
  Top Layer w23.62: R75.1@6660,2118 L25.1@6660,2293 ; 6660,2249.09 ccw(c6616.09,2249.09) 6647.14,2280.14 cw(c6616.09,2249.09) 6660,2249.09 ; 6660,2249.09 cw(c6703.91,2249.09) 6672.86,2280.14 ccw(c6703.91,2249.09) 6660,2249.09
NetN1_1: N1.1 R42.1 | length 145.4
  Top Layer w31.5: R42.1@5566,3068 5611,3113 N1.1@5692.75,3113
NetN3_7: N3.7 R151.1 | length 364.4
  Top Layer w10: N3.7@9392.31,5134.76 ccw(c9368.92,5158.15) 9402,5158.15 ccw(c9435.08,5158.15) N3.7@9411.69,5134.76 ; N3.7@9402,5080.78 9402,5171 v1(9406,5175) ; 9402,5153.65 cw(c9427.35,5153.65) v1@9409.42,5171.58
  Bottom Layer w10: R151.1@9333,5102 9388,5102 9405,5119 9405,5174 v1(9406,5175) ; R151.1@9342.19,5092.81 cw(c9364.38,5070.62) 9364.38,5102 cw(c9364.38,5133.38) R151.1@9342.19,5111.19 ; 9405,5160.9 cw(c9420.1,5160.9) v1@9409.42,5171.58
NetO2_6: O2.6 R112.2 R124.1 | length 959.8
  Top Layer w20: v3(9115,3705) R112.2@9115,3645 9220,3645 9245,3670 9368,3670 9399,3701 9399,3746 9424,3771 9506.67,3771 O2.6@9557,3821.33 ; O2.6@9537.47,3821.33 cw(c9490.33,3821.33) 9523.66,3788 cw(c9557,3754.66) O2.6@9557,3801.81 ; 9115,3664.31 ccw(c9134.31,3664.31) 9120.66,3650.66 cw(c9134.31,3664.31) 9115,3664.31 ; 9115,3664.31 cw(c9095.69,3664.31) 9109.34,3650.66 ccw(c9095.69,3664.31) 9115,3664.31 ; 9135.31,3645 ccw(c9135.31,3625.69) 9121.66,3639.34 cw(c9135.31,3625.69) 9135.31,3645 ; 9135.31,3645 cw(c9135.31,3664.31) 9121.66,3650.66 ccw(c9135.31,3664.31) 9135.31,3645
  Bottom Layer w20: R124.1@9021,3725 9095,3725 v3(9115,3705) ; 9040.31,3725 ccw(c9040.31,3705.69) 9026.66,3719.34 cw(c9040.31,3705.69) 9040.31,3725 ; 9040.31,3725 cw(c9040.31,3744.31) 9026.66,3730.66 ccw(c9040.31,3744.31) 9040.31,3725
NetO4_6: O4.6 R114.2 R125.1 | length 1076.6
  Top Layer w20: v3(9115,2395) R114.2@9115,2339 9217,2339 9237,2359 9485,2359 9511.47,2385.47 9511.47,2429.39 9512,2429.91 9512,2465 O4.6@9557,2510 ; O4.6@9537.47,2510 cw(c9490.33,2510) 9523.66,2476.66 cw(c9557,2443.33) O4.6@9557,2490.47 ; 9115,2358.31 ccw(c9134.31,2358.31) 9120.66,2344.66 cw(c9134.31,2358.31) 9115,2358.31 ; 9115,2358.31 cw(c9095.69,2358.31) 9109.34,2344.66 ccw(c9095.69,2358.31) 9115,2358.31 ; 9135.31,2339 ccw(c9135.31,2319.69) 9121.66,2333.34 cw(c9135.31,2319.69) 9135.31,2339 ; 9135.31,2339 cw(c9135.31,2358.31) 9121.66,2344.66 ccw(c9135.31,2358.31) 9135.31,2339
  Bottom Layer w20: R125.1@9021,2411 9099,2411 v3(9115,2395) ; 9040.31,2411 ccw(c9040.31,2391.69) 9026.66,2405.34 cw(c9040.31,2391.69) 9040.31,2411 ; 9040.31,2411 cw(c9040.31,2430.31) 9026.66,2416.66 ccw(c9040.31,2430.31) 9040.31,2411 ; 9064.3,2411 cw(c9064.3,2344.3) 9111.46,2391.46 ccw(c9064.3,2344.3) 9064.3,2411
NetP1_2: P1.2 RT1.1 | length 523.7
  Bottom Layer w80: RT1.1@9545,5078 9670,5078 9710,5118 9710,5348 9689.76,5368.24 P1.2@9606.26,5368.24
NetR3_2: R3.2 R7.2 R13.2 R16.2 U4.2 | length 1192.2
  Top Layer w47.24: R3.2@3976.38,4417.32 R7.2@4132.98,4417.32 R13.2@4289.59,4417.32 4360.02,4417.32 ; 4369,4417.32 4360.02,4417.32 ; U4.2@4597.64,4052.76 4665.76,4052.76 4746.65,4133.65 4746.65,4326.35 4655.68,4417.32 R16.2@4446.19,4417.32 4360.02,4417.32
NetR20_2: R20.2 U4.1 | length 346.4
  Top Layer w31.5: R20.2@4581,4290 4597.64,4273.36 U4.1@4597.64,4152.76 ; 4597.64,4186.02 ccw(c4630.9,4186.02) 4607.38,4162.5 cw(c4630.9,4186.02) 4597.64,4186.02 ; 4597.64,4186.02 cw(c4564.37,4186.02) 4587.89,4162.5 ccw(c4564.37,4186.02) 4597.64,4186.02 ; R20.2@4579.41,4287.41 cw(c4535.4,4243.4) 4597.64,4243.4 ccw(c4535.4,4243.4) R20.2@4579.41,4287.41
NetR21_1: R21.1 R29.2 U6.6 | length 545.5
  Top Layer w31.5: R21.1@4644,2828 4699,2773 4827,2773 4988,2773 R29.2@5002,2787 ; 4853,2773 U6.6@4853,2848.25 ; 4961.76,2773 ccw(c4961.76,2826.24) 4999.41,2788.59 cw(c4961.76,2826.24) 4961.76,2773
NetR22_1: R22.1 R30.2 U6.3 | length 644.4
  Top Layer w31.5: R22.1@4644,2615 4644,2666 4699,2721 4980,2721 R30.2@5002,2699 ; U6.3@4853,2644 4853,2721 ; 4942.45,2721 cw(c4942.45,2640.45) 4999.41,2697.41 ccw(c4942.45,2640.45) 4942.45,2721
NetR24_1: R24.1 X1.3 | length 200
  Top Layer w31.5: R24.1@7761,3837 X1.3@7907,3837 ; X1.3@7889.92,3826.92 ccw(c7865.59,3802.59) 7865.59,3837 ccw(c7865.59,3871.41) X1.3@7889.92,3847.08
NetR26_1: R26.1 U4.10 | length 278
  Top Layer w23.62: U4.10@4897,4153.39 U4.10@4897.64,4152.76
  Top Layer w31.5: U4.10@4897,4153.39 R26.1@4897,4326 ; U4.10@4887.89,4162.5 ccw(c4865.91,4184.48) 4897,4184.48 cw(c4865.91,4184.48) U4.10@4887.89,4162.5 ; 4897,4187.56 ccw(c4932.44,4187.56) 4907.38,4162.5 cw(c4932.44,4187.56) 4897,4187.56
NetR32_1: R32.1 U3.7 | length 456
  Top Layer w39.37: U3.7@4597.64,4900 4665,4900 4744.09,4979.09 R32.1@4744.09,5255.91
NetR35_1: R35.1 R45.2 U15.6 | length 819.8
  Top Layer w31.5: R35.1@5375,2828 5518,2828 5581,2765 5689,2765 ; U15.6@5719,2848.25 5719,2795 ; 5755,2765 5749,2765 ; R45.2@5859,2787 5837,2765 5749,2765 ; 5689,2765 5719,2765 ; 5689,2765 5719,2795 ; 5719,2765 5749,2765 ; 5719,2765 5719,2795 ; 5719,2795 5749,2765 ; 5799.45,2765 ccw(c5799.45,2845.55) 5856.41,2788.59 cw(c5799.45,2845.55) 5799.45,2765
NetR36_1: R36.1 R46.2 U15.3 | length 737.5
  Top Layer w31.5: R36.1@5375,2615 5501,2615 5602,2716 5701,2716 ; U15.3@5719,2644 5719,2698 ; R46.2@5859,2699 5842,2716 5737,2716 ; 5701,2716 5737,2716 ; 5701,2716 5719,2698 ; 5719,2698 5737,2716 ; 5811.52,2716 cw(c5811.52,2652.52) 5856.41,2697.41 ccw(c5811.52,2652.52) 5811.52,2716
NetR37_2: R37.2 U12.6 U17.1 | length 710.5
  Top Layer w20: R37.2@5291,5429 5354,5429 5376,5407 5376,5320 5431.31,5264.69 U12.6@5511.62,5264.69 5573.69,5264.69 5672.12,5363.12 U17.1@5811.4,5363.12 ; R37.2@5297.66,5423.34 cw(c5311.31,5409.69) 5311.31,5429 cw(c5311.31,5448.31) R37.2@5297.66,5434.66
NetR41_2: R41.2 U17.2 | length 415.8
  Top Layer w20: R41.2@5631,5114 5631,5271 5673.91,5313.91 U17.2@5811.4,5313.91 ; 5631,5133.31 ccw(c5650.31,5133.31) 5636.66,5119.66 cw(c5650.31,5133.31) 5631,5133.31 ; 5631,5133.31 cw(c5611.69,5133.31) 5625.34,5119.66 ccw(c5611.69,5133.31) 5631,5133.31
NetR43_2: R43.2 U13.5 | length 210
  Top Layer w20: U13.5@5511.62,4880.48 5659.52,4880.48 R43.2@5665,4875 ; 5634.87,4880.48 cw(c5634.87,4845.87) 5659.34,4870.34 ccw(c5634.87,4845.87) 5634.87,4880.48
NetR49_1: R49.1 U14.9 | length 783.5
  Top Layer w15: U14.9@5527,3565.76 5527,3654 5560,3687 R49.1@6129,3687 ; 6102.65,3687 ccw(c6102.65,3712.35) 6120.58,3694.42 cw(c6102.65,3712.35) 6102.65,3687 ; 6102.65,3687 cw(c6102.65,3661.65) 6120.58,3679.58 ccw(c6102.65,3661.65) 6102.65,3687
NetR50_2: R50.2 U14.8 | length 871
  Top Layer w20: v3(5527,3814) U14.8@5527,3926 ; v3(6066.5,3581.5) R50.2@6129,3581.5 ; 6108.69,3581.5 ccw(c6108.69,3600.81) 6122.34,3587.16 cw(c6108.69,3600.81) 6108.69,3581.5 ; 6108.69,3581.5 cw(c6108.69,3562.19) 6122.34,3575.84 ccw(c6108.69,3562.19) 6108.69,3581.5
  Bottom Layer w20: v3(5527,3814) 5626,3814 5858.5,3581.5 v3(6066.5,3581.5)
NetR53_1: R53.1 R58.2 | length 113
  Top Layer w23.62: R53.1@6088,2699 R58.2@6201,2699
NetR66_1: R66.1 U22.AB4 | length 419.6
  Top Layer w15: R66.1@6402,4002 6420,4002 6464.42,3957.58 6544.42,3957.58 6554,3957.58 v1(6699.54,3957.58) U22.AB4@6719.23,3937.89 ; R66.1@6403,3991.5 cw(c6403,3925.11) 6449.95,3972.05 ; R66.1@6403,4006.5 cw(c6403,3976.32) 6424.34,3997.66
NetR73_2: R73.2 U21.25 | length 232.4
  Top Layer w10: R73.2@6558,4367 6599.51,4408.51 U21.25@6599.51,4483.57 ; R73.2@6558,4381 ccw(c6558,4414.8) 6581.9,4390.9 cw(c6558,4414.8) R73.2@6558,4381 ; R73.2@6571,4368 cw(c6599.97,4368) 6579.49,4388.49 ccw(c6599.97,4368) R73.2@6571,4368
NetR76_2: R76.2 U21.26 | length 233.3
  Top Layer w10: U21.26@6619.2,4483.57 6619.2,4410.8 R76.2@6663,4367 ; 6639.1,4390.9 ccw(c6663,4414.8) 6663,4381 cw(c6663,4414.8) 6639.1,4390.9 ; 6641.51,4388.49 cw(c6621.03,4368) 6650,4368 ccw(c6621.03,4368) 6641.51,4388.49
NetR79_1: R79.1 U21.9 | length 813.4
  Top Layer w10: U21.9@6638.88,4672.54 6638.88,4703.88 v12(6658,4723) ; 6646.37,4711.37 cw(c6658,4699.75) v12@6658,4716.19 ; 6646.37,4711.37 ccw(c6634.75,4723) v12@6651.19,4723 ; 6646.37,4711.37 cw(c6658,4699.75) v12@6658,4716.19 ; 6646.37,4711.37 ccw(c6634.75,4723) v12@6651.19,4723 ; 6646.37,4711.37 ccw(c6634.75,4723) v12@6651.19,4723 ; 6646.37,4711.37 cw(c6658,4699.75) v12@6658,4716.19
  Top Layer w15: R79.1@6902,4710 v3(6902,4767) ; v3@6896.7,4761.7 cw(c6883.89,4748.89) 6902,4748.89 ; v3@6896.7,4761.7 cw(c6883.89,4748.89) 6902,4748.89 ; v3@6896.7,4761.7 cw(c6883.89,4748.89) 6902,4748.89 ; 6902,4735.35 ccw(c6927.35,4735.35) 6909.42,4717.42 cw(c6927.35,4735.35) 6902,4735.35 ; 6902,4735.35 cw(c6876.65,4735.35) 6894.58,4717.42 ccw(c6876.65,4735.35) 6902,4735.35 ; 6902,4748.89 cw(c6920.11,4748.89) v3@6907.3,4761.7 ; 6902,4748.89 cw(c6920.11,4748.89) v3@6907.3,4761.7 ; 6902,4748.89 cw(c6920.11,4748.89) v3@6907.3,4761.7
  Bottom Layer w12: v12(6658,4723) 6688,4693 6724,4693 6798,4767 v3(6902,4767) ; v12@6658,4717.19 cw(c6658,4703.16) 6667.92,4713.08 ; v12@6658,4717.19 cw(c6658,4703.16) 6667.92,4713.08 ; v12@6658,4717.19 cw(c6658,4703.16) 6667.92,4713.08 ; v12@6663.81,4723 ccw(c6677.84,4723) 6667.92,4713.08 ; v12@6663.81,4723 ccw(c6677.84,4723) 6667.92,4713.08 ; v12@6663.81,4723 ccw(c6677.84,4723) 6667.92,4713.08 ; 6880.27,4767 cw(c6880.27,4745.27) v3@6895.64,4760.64 ; 6880.27,4767 ccw(c6880.27,4788.73) v3@6895.64,4773.36 ; 6880.27,4767 cw(c6880.27,4745.27) v3@6895.64,4760.64 ; 6880.27,4767 ccw(c6880.27,4788.73) v3@6895.64,4773.36 ; 6880.27,4767 ccw(c6880.27,4788.73) v3@6895.64,4773.36 ; 6880.27,4767 cw(c6880.27,4745.27) v3@6895.64,4760.64
NetR81_2: R81.2 U23.35 | length 277.3
  Top Layer w7: U23.35@7235.01,2624 7235.01,2609.82 ; 7278.24,2566.58 ccw(c7326.1,2614.45) R81.2@7326.1,2546.76 ; 7290.19,2554.63 ccw(c7326.1,2590.55) R81.2@7326.1,2539.76 ; 7302.14,2542.69 ccw(c7326.1,2566.65) R81.2@7326.1,2532.76 ; R81.2@7327.1,2532.26 7312.57,2532.26 7235.01,2609.82 ; 7235.01,2609.82 ccw(c7229.24,2609.82) 7233.12,2614.08 cw(c7229.24,2609.82) 7235.01,2609.82 ; 7235.01,2609.82 cw(c7240.77,2609.82) 7236.89,2614.08 ccw(c7240.77,2609.82) 7235.01,2609.82
NetR85_2: R85.2 U22.N22 | length 211.2
  Top Layer w10: R85.2@6998.03,3116.41 ccw(c6980.34,3135) 7006,3135 ; R85.2@7007,3106 7006,3107 7006,3135 ; R85.2@7014.8,3117.4 cw(c7028,3135) 7006,3135 ; U22.N22@7070.14,3225.8 cw(c7061.87,3217.54) 7073.56,3217.54 cw(c7085.25,3217.54) U22.N22@7076.98,3225.8 ; U22.N22@7073.56,3229.23 7073.56,3202.56 7006,3135
NetR87_2: R87.2 U24.15 | length 143.3
  Top Layer w12: R87.2@7791.51,3074.51 cw(c7778.41,3061.41) 7796.94,3061.41 ; U24.15@7796.94,2991.84 7796.94,3066.94 R87.2@7813,3083 ; 7796.94,3046.65 cw(c7836.35,3046.65) R87.2@7808.49,3074.51
NetR92_2: R92.2 U24.5 | length 189.8
  Top Layer w10: U24.5@7937.84,2909.94 7956.94,2909.94 7973,2926 7973,2978 7982,2987 R92.2@8016,2987 ; R92.2@8005.81,2977.81 ccw(c7983.62,2955.62) 7983.62,2987 ccw(c7983.62,3018.38) R92.2@8005.81,2996.19
NetR93_1: R93.1 U24.32 | length 276
  Top Layer w10: R93.1@7846.89,2666.16 ccw(c7833.46,2683) 7855,2683 ; R93.1@7855,2656 7855,2683 ; R93.1@7863.11,2666.16 cw(c7876.54,2683) 7855,2683 ; U24.32@7915.04,2808.44 7915.04,2773.96 7943,2746 7943,2708 7929,2694 7866,2694 7855,2683